# Altium PCB PCB1.PcbDoc
Units mm, origin at the board's own origin, x right, y up, seen from the top; angles counter-clockwise.
Board outline 70.61 x 51.82 mm, 2 copper layers (Top Layer, Bottom Layer); 33 components, 26 nets, 155 pads, 22 vias.
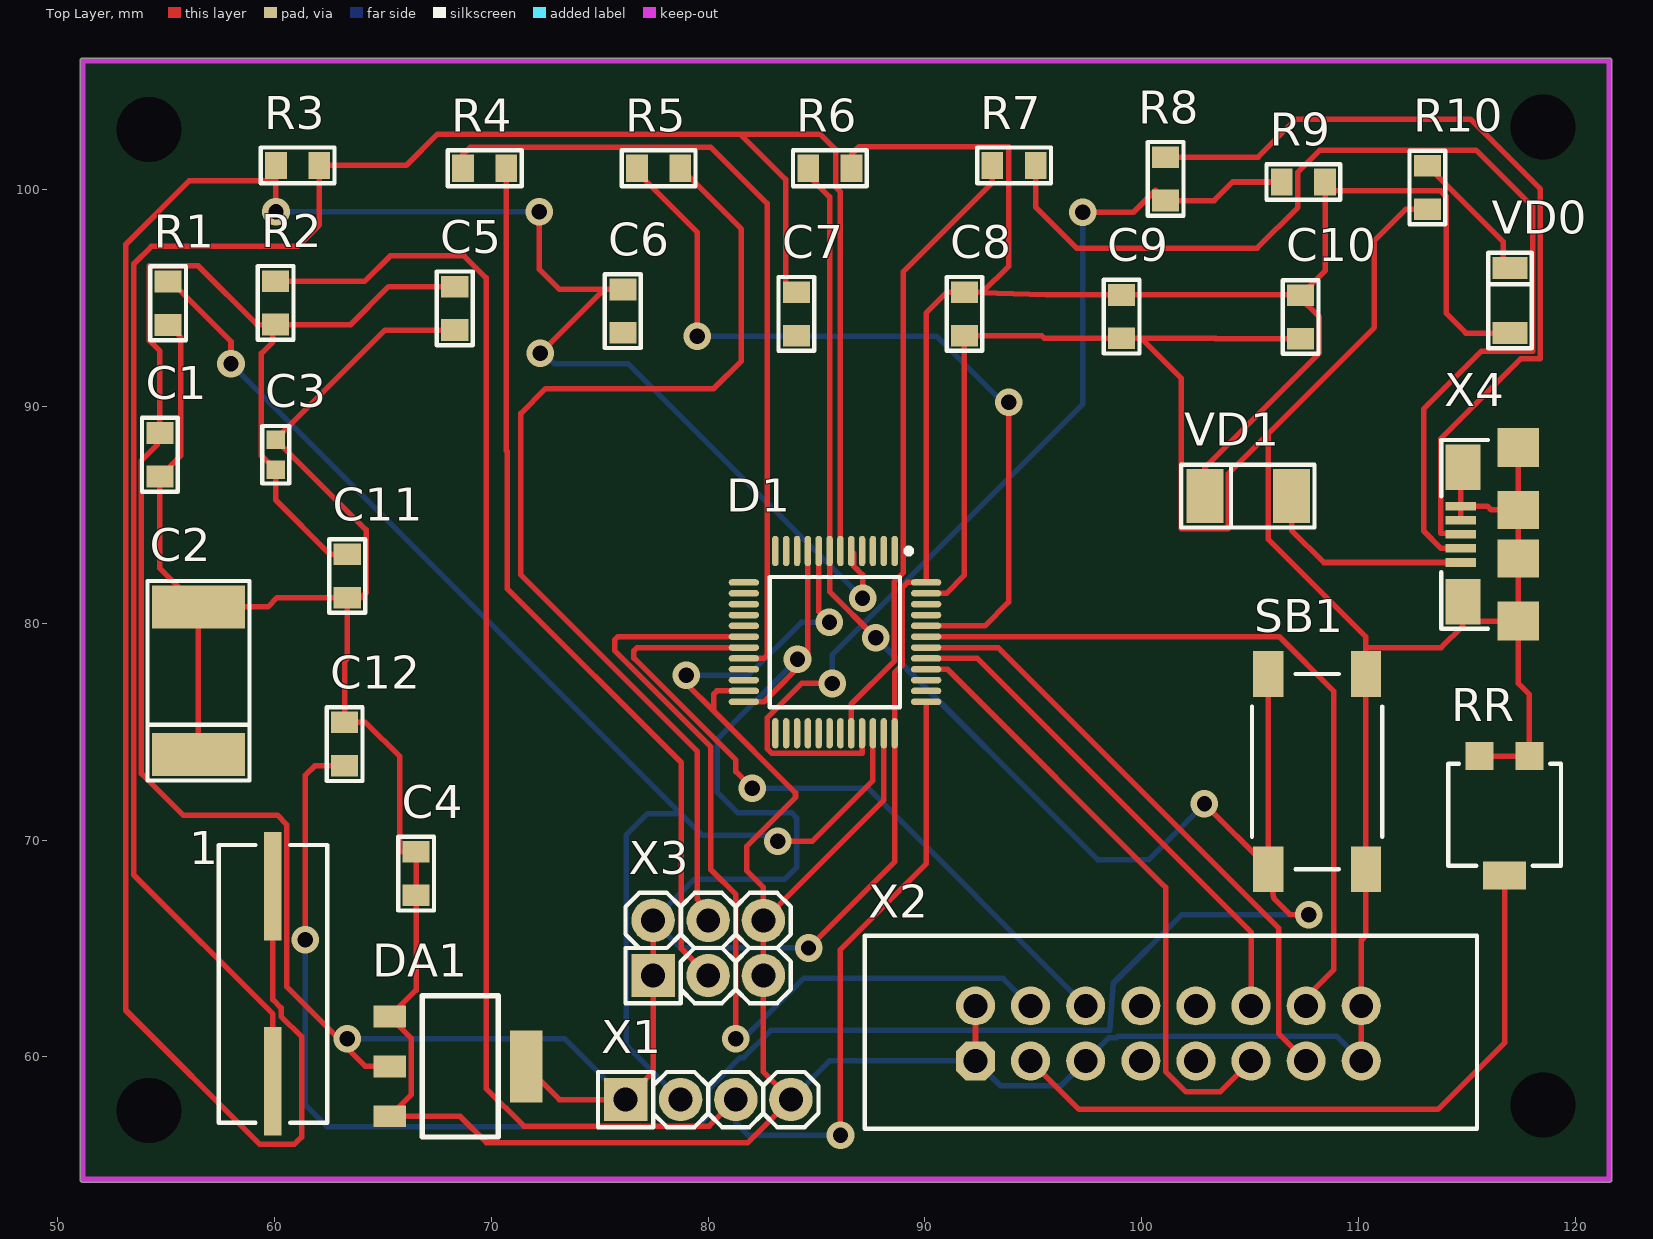
[diagram p0: Top Layer view]
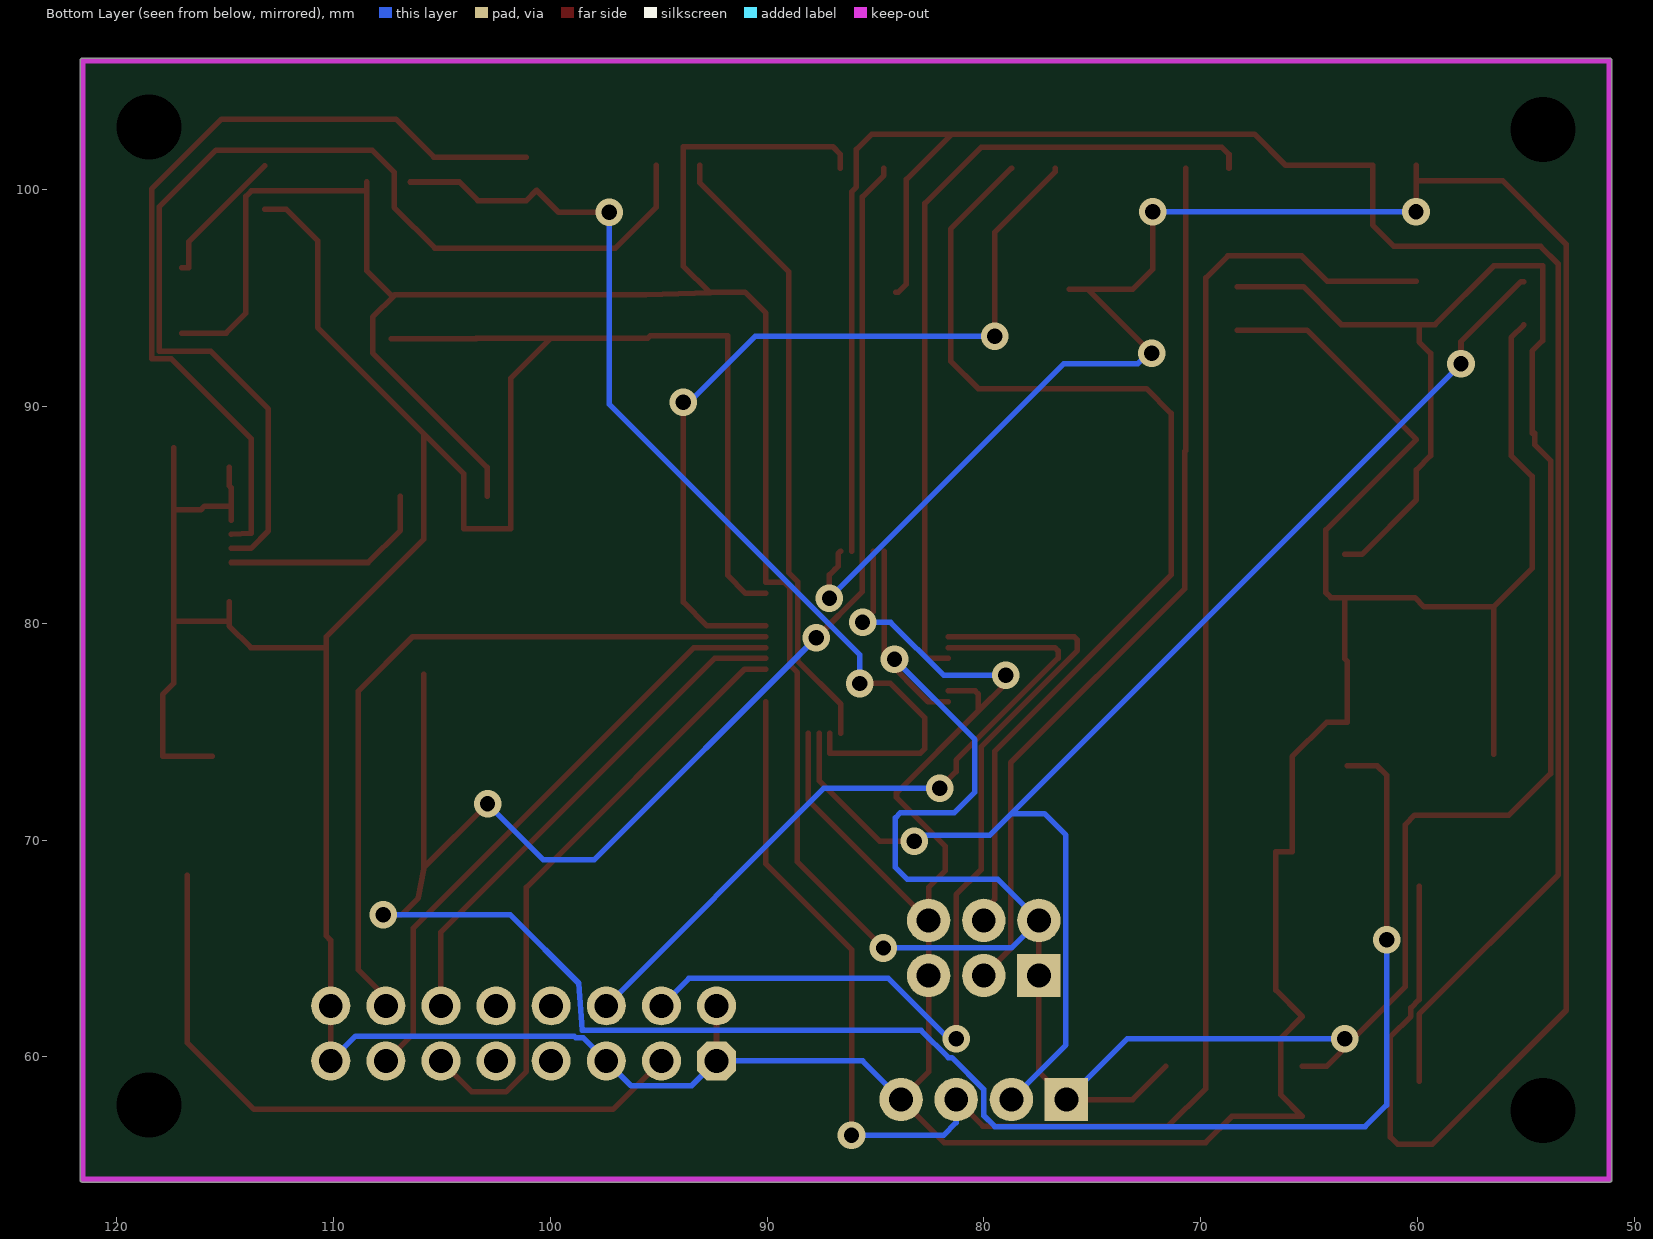
[diagram p1: Bottom Layer view, seen from below]
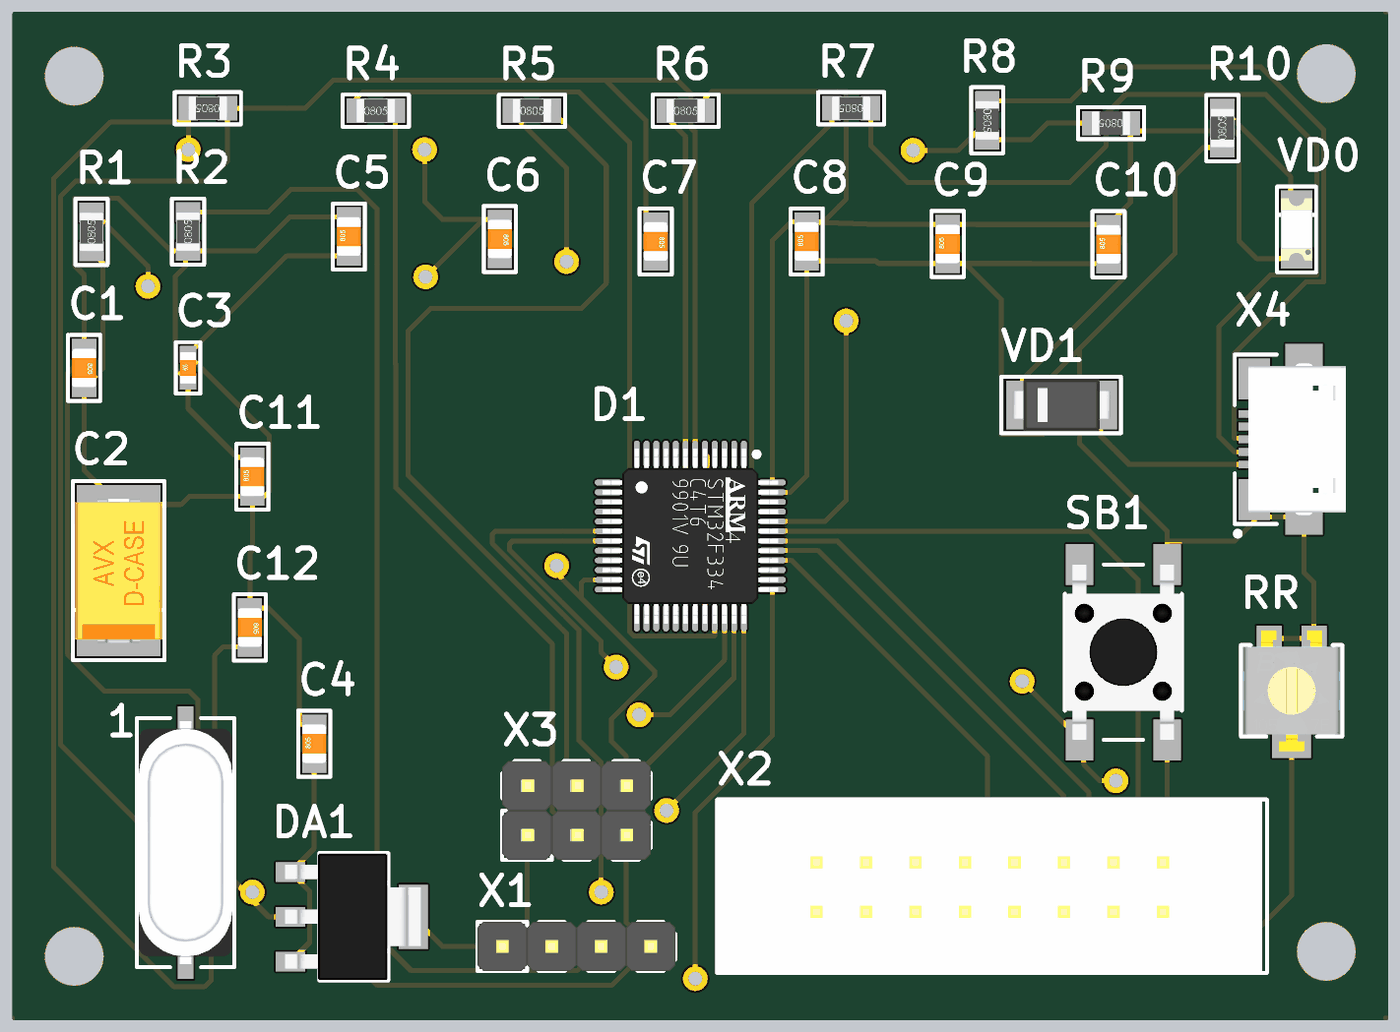
[diagram p2: 3D render of the assembled board from above, using the file's embedded part models]

## Layer stack, top to bottom
Top Solder: solder mask 0.0102, Solder Resist, Dk 3.5
Top Layer: signal copper 0.0356
Dielectric 1: dielectric 0.32, FR-4, Dk 4.8
Bottom Layer: signal copper 0.0356
Bottom Solder: solder mask 0.0102, Solder Resist, Dk 3.5

## Board outline
51.054,54.356 51.054,105.918 cw(c51.181,105.918) 51.181,106.045 121.539,106.045 cw(c121.539,105.918) 121.666,105.918 121.666,54.356 cw(c121.539,54.356) 121.539,54.229 51.181,54.229 cw(c51.181,54.356)

## Design rules (kind name [scope] priority, off if disabled: settings)
Clearance [All] p1: gap=0.1 ignorepadtopadclearanceinfootprint=FALSE
DiffPairsRouting [All] p1: maxlimit=0.254 minlimit=0.1 mostfreqgap=0.254 toplayer_minwidth=0.1 toplayer_maxwidth=0.381 toplayer_prefwidth=0.381 bottomlayer_minwidth=0.1 bottomlayer_maxwidth=0.381 bottomlayer_prefwidth=0.381 maxuncoupledlength=12.7
PolygonConnect [All] p1: connectstyle=Relief reliefconductorwidth=0.254 reliefentries=4 polygonreliefangle="90 Angle" airgapwidth=0.254
RoutingVias [All] p1: holewidth=0.711 width=1.27 viastyle="Through Hole" minholewidth=0.711 minwidth=1.27 maxholewidth=0.711 maxwidth=1.27
SolderMaskExpansion [All] p1: expansion=0.102 istentingtop=FALSE
Width [All] p1: maxlimit=0.254 minlimit=0.254 preferedwidth=0.254
29 further rules are at their usual default settings.

## Components (designator, comment, footprint, x,y, rotation, side; value= is the part's Value field where it differs from the comment)
1 "Crystal" HC-49SM 59.944,63.373 r90 top value=HC49S-8.000MHZ-20pF
C1 "Ceramic capacitor, 100nF, X7R, ±10%, 16V, 0805, -55...+125°C" "CAP: 0805" 54.737,87.757 r270 top value=100nF
C2 "Tantalum capacitor, 100uF, 16V, ±20%, 900mOhm, case D (7343), -55...+125°C" "CAP: TANTAL-D" 56.515,77.343 r90 top value=100uF
C3 "Aluminium capacitor, 330uF, 16V, ±20%, 54mOhm, 14x10x5 mm, -55...+105°C" "CAP: 0603" 60.071,87.757 r90 top value=330uF
C4 "Ceramic capacitor, 100nF, X7R, ±10%, 16V, 0805, -55...+125°C" "CAP: 0805" 66.548,68.453 r90 top value=100nF
C5 "Ceramic capacitor, 100nF, X7R, ±10%, 16V, 0805, -55...+125°C" "CAP: 0805" 68.326,94.504 r90 top value=100nF
C6 "Ceramic capacitor, 20pF, X7R, ±10%, 16V, 0805, -55...+125°C" "CAP: 0805" 76.073,94.377 r270 top value=20pF
C7 "Ceramic capacitor, 20pF, X7R, ±10%, 16V, 0805, -55...+125°C" "CAP: 0805" 84.074,94.25 r270 top value=20pF
C8 "Ceramic capacitor, 100nF, X7R, ±10%, 16V, 0805, -55...+125°C" "CAP: 0805" 91.821,94.25 r90 top value=100nF
C9 "Ceramic capacitor, 100nF, X7R, ±10%, 16V, 0805, -55...+125°C" "CAP: 0805" 99.06,94.123 r90 top value=100nF
C10 "Ceramic capacitor, 100nF, X7R, ±10%, 16V, 0805, -55...+125°C" "CAP: 0805" 107.315,94.107 r90 top value=100nF
C11 "Ceramic capacitor, 100nF, X7R, ±10%, 16V, 0805, -55...+125°C" "CAP: 0805" 63.373,82.169 r90 top value=100nF
C12 "Ceramic capacitor, 1μF, X7R, ±10%, 16V, 0805, -55...+125°C" "CAP: 0805" 63.246,74.422 r270 top value=1μF
D1 "IC microcontroller, 32-Bit, Cortex-M3, 72MHz, 64KB, 20KB, 2...3.6V, -40...+85°C, 48-LQFP" 48-LQFP 85.852,79.121 r270 top
DA1 "LM1117-Series" SOT-223 68.58,59.563 r270 top value=LM1117MPX-3.3
R1 "Resistor film, 10кОм, ±5%, 0805, 0.125W, -55...+125°C" "RES: 0805" 55.118,94.742 r90 top value=10кОм
R2 "Resistor film, 10кОм, ±5%, 0805, 0.125W, -55...+125°C" "RES: 0805" 60.071,94.758 r90 top value=10кОм
R3 "Resistor film, 1МОм, ±5%, 0805, 0.125W, -55...+125°C" "RES: 0805" 61.087,101.092 r180 top value=1МОм
R4 "Resistor film, 100кОм, ±5%, 0805, 0.125W, -55...+125°C" "RES: 0805" 69.707,100.965 r0 top value=100кОм
R5 "Resistor film, 100кОм, ±5%, 0805, 0.125W, -55...+125°C" "RES: 0805" 77.724,100.965 r0 top value=100кОм
R6 "Resistor film, 10R, ±5%, 0805, 0.125W, -55...+125°C" "RES: 0805" 85.614,100.965 r0 top value=10R
R7 "Resistor film, 20, ±5%, 0805, 0.125W, -55...+125°C" "RES: 0805" 94.107,101.092 r180 top value=20
R8 "Resistor film, 20, ±5%, 0805, 0.125W, -55...+125°C" "RES: 0805" 101.092,100.473 r270 top value=20
R9 "Resistor film, 10, ±5%, 0805, 0.125W, -55...+125°C" "RES: 0805" 107.442,100.33 r180 top value=10
R10 "Resistor film, 510, ±5%, 0805, 0.125W, -55...+125°C" "RES: 0805" 113.157,100.076 r90 top value=510
RR "Resistor film, 10k, ±10%, 3296W, 0.5W, -55...+125°C" "RES: 3314G" 116.713,71.12 r0 top value=10k
SB1 "Tactile button, 6x6mm" "BUT: 6x6 SMD" 108.077,73.152 r270 top
VD0 "LED, Green, *, *, *, -55...+150°C" "LED: 1206B" 116.967,94.869 r90 top
VD1 "Schottky diode, 80V, 500mA, 1V, 15pF, SOD-123, -55...+150°C" "DIODE: SMA" 104.902,85.852 r180 top
X1 "Connector, 4pin, 2.54mm, 500VAC, 3A" "CON: PLS-4" 80.01,58.039 r0 top
X2 "Connector, 16pin, 2.54mm, 250VAC, 3A" "CON: IDC-16MS" 101.219,61.087 r0 top
X3 "Connector, 6pin, 2.54mm, 500VAC, 3A" "CON: PLD-6" 80.01,65.024 r0 top
X4 "USB micro B" "CON: USB micro-A (ZX62-B-5PA)" 114.698,84.092 r90 top

## Footprints (in the part's own frame and the unit in brackets; to place one, negate y for a bottom-side part, rotate by r counter-clockwise, add the part's x,y. Pads: shape width x height; smd on the part's side, far side on the other; paste and mask are expansions set on the pad)
48-LQFP [mm] "QFP, 48-Leads, Body 7x7mm, Pitch 0.5mm, IPC Medium Density"
  oval 1.4x0.3 smd: 1(-4.2,2.75) 2(-4.2,2.25) 3(-4.2,1.75) 4(-4.2,1.25) 5(-4.2,0.75) 6(-4.2,0.25) 7(-4.2,-0.25) 8(-4.2,-0.75) 9(-4.2,-1.25) 10(-4.2,-1.75) 11(-4.2,-2.25) 12(-4.2,-2.75) 25(4.2,-2.75) 26(4.2,-2.25) 27(4.2,-1.75) 28(4.2,-1.25) 29(4.2,-0.75) 30(4.2,-0.25) 31(4.2,0.25) 32(4.2,0.75) 33(4.2,1.25) 34(4.2,1.75) 35(4.2,2.25) 36(4.2,2.75)
  oval 0.3x1.4 smd: 13(-2.75,-4.2) 14(-2.25,-4.2) 15(-1.75,-4.2) 16(-1.25,-4.2) 17(-0.75,-4.2) 18(-0.25,-4.2) 19(0.25,-4.2) 20(0.75,-4.2) 21(1.25,-4.2) 22(1.75,-4.2) 23(2.25,-4.2) 24(2.75,-4.2) 37(2.75,4.2) 38(2.25,4.2) 39(1.75,4.2) 40(1.25,4.2) 41(0.75,4.2) 42(0.25,4.2) 43(-0.25,4.2) 44(-0.75,4.2) 45(-1.25,4.2) 46(-1.75,4.2) 47(-2.25,4.2) 48(-2.75,4.2)
  round 0.5 on Mech1: ""(-4,4)
  silkscreen extent -4.32,-3 3,3.53, body extent -4.5,-4.5 4.5,4.5, height 1.6
"BUT: 6x6 SMD" [mm] "Leaded Tactile Button 6x6"
  rect 2.1x1.4 smd: 1(-4.5,2.25) 1(4.5,2.25) 2(-4.5,-2.25) 2(4.5,-2.25)
  silkscreen extent -4.5,-3 4.5,3, body extent -4.5,-3 4.5,3, height 4.3
"CAP: 0603" [mm]
  rect 0.85x0.85 smd: 1(-0.7,0) 2(0.7,0)
  silkscreen extent -1.33,-0.62 1.33,0.62, body extent -0.8,-0.4 0.8,0.4, height 0.3
"CAP: 0805" [mm]
  rect 1x1.25 smd: 1(-1,0) 2(1,0)
  silkscreen extent -1.7,-0.82 1.7,0.82, body extent -1,-0.62 1,0.63, height 0.78
"CAP: TANTAL-D" [mm]
  rect 2x4.3 smd: 1(-3.4,0) 2(3.4,0)
  silkscreen extent -4.6,-2.35 4.6,2.35, body extent -3.7,-2.22 3.7,2.23, height 3.01
"CON: IDC-16MS" [mm] "IDC-16MS straight leads pcb mount"
  oct 1.8x1.8 hole 1.1: 1(-8.89,-1.27)
  round 1.8 hole 1.1: 2(-8.89,1.27) 3(-6.35,-1.27) 4(-6.35,1.27) 5(-3.81,-1.27) 6(-3.81,1.27) 7(-1.27,-1.27) 8(-1.27,1.27) 9(1.27,-1.27) 10(1.27,1.27) 11(3.81,-1.27) 12(3.81,1.27) 13(6.35,-1.27) 14(6.35,1.27) 15(8.89,-1.27) 16(8.89,1.27)
  round 0.5 on Mech1: 39(-13.5,-3.9)
  silkscreen extent -14,-4.4 14.22,4.5, body extent -13.98,-4.4 13.99,4.4, height 9.1
"CON: PLD-6" [mm]
  rect 2x2 hole 1.1: 1(-2.54,-1.27)
  round 2 hole 1.1: 2(-2.54,1.27) 3(0,-1.27) 4(0,1.27) 5(2.54,-1.27) 6(2.54,1.27)
  silkscreen extent -3.81,-2.54 3.81,2.54, body extent -3.81,-2.54 3.81,2.54, height 8.54
"CON: PLS-4" [mm] "PLS-40 4 pin header"
  rect 2x2 hole 1.1: 1(-3.81,0)
  round 2 hole 1.1: 2(-1.27,0) 3(1.27,0) 4(3.81,0)
  silkscreen extent -5.08,-1.27 5.08,1.27, body extent -5.08,-1.27 5.08,1.27, height 8.54
"CON: USB micro-A (ZX62-B-5PA)" [mm]
  rect 1.8x1.9 smd: 0(-4,-2.65) 0(4,-2.65)
  rect 2.1x1.6 smd: 0(-3.1,-0.1) 0(3.1,-0.1)
  rect 1.75x1.9 smd: 0(-1.125,-2.65) 0(1.125,-2.65)
  rect 0.4x1.4 smd: 1(-1.3,0) 2(-0.65,0) 3(0,0) 4(0.65,0) 5(1.3,0)
  round 0.5 on Top Overlay: ""(-4.85,0.75)
  silkscreen extent -4.35,-1.25 4.35,0.9, body extent -3.9,-4.8 3.9,0.2, height 2.68
"DIODE: SMA" [mm]
  rect 1.7x2.5 smd: 1(-2,0) 2(2,0)
  round 0.5 on Mech1: ""(2,0.9)
  silkscreen extent -3.05,-1.45 3.1,1.45, body extent -2.5,-1.35 2.5,1.35, height 2.28
HC-49SM [mm] "HC49 Surface Mount Footprint"
  rect 5x0.8 smd: 1(-4.5,0) 3(4.5,0)
  silkscreen extent -6.4,-2.5 6.4,2.5, body extent -6.25,-2.4 6.25,2.4, height 4.02
"LED: 1206B" [mm]
  rect 1x1.6 smd: 1(-1.5,0) 2(1.5,0)
  silkscreen extent -2.2,-1 2.2,1, body extent -1.6,-0.8 1.6,0.8, height 1.1
"RES: 0805" [mm]
  rect 1x1.25 smd: 1(-1,0) 2(1,0)
  silkscreen extent -1.7,-0.82 1.7,0.82, body extent -1,-0.6 1,0.6, height 0.44
"RES: 3314G" [mm]
  rect 1.3x1.3 smd: 1(-1.15,2.75) 3(1.15,2.75)
  rect 2x1.3 smd: 2(0,-2.75)
  round 0.5 on Mech1: ""(-2,2.65)
  silkscreen extent -2.6,-2.3 2.6,2.4, body extent -2.5,-3.05 2.5,3.15, height 2.72
SOT-223 [mm]
  rect 1x1.5 smd: 1(-2.3,-3.25) 2(0,-3.25) 3(2.3,-3.25)
  rect 3.3x1.5 smd: 2(0,3.05)
  silkscreen extent -3.25,-1.75 3.25,1.75, body extent -3.25,-3.53 3.25,3.43, height 1.65

## Part data
1: library part HC49SM-8.000MHz-20pF, Load Capacitance=20pF, Output Frequency=8MHz, Temperature Coefficient=±50ppm, Application Category=1, ID=17, Part Number=HC49SM-8.000MHz-20pF, Published=08.03.2013, Publisher="Andrew Danich", Type=Резонатор
C1 C4 C5 C6 C7 C8 C9 C10 C11 C12: library part Ceramic_0805, Manufacturer=Yageo, Package=0805, PartNumber=CC0805KRX7R7BB104, Temperature=-55...+125°C, Tolerance=±10%, TypeCapacitor="Ceramic capacitor", TypeDielectric=X7R, Voltage=16V, HelpURL=https://www.digikey.com/product-detail/en/yageo/CC0805KRX7R7BB104/311-1142-1-ND/303052
  C1 C4 C5 C8 C9 C10 C11: ValueManufacturerPartNumber="Ceramic capacitor, 100nF, X7R, ±10%, 16V, 0805, -55...+125°C"
  C6 C7: ValueManufacturerPartNumber="Ceramic capacitor, 20pF, X7R, ±10%, 16V, 0805, -55...+125°C"
  C12: ValueManufacturerPartNumber="Ceramic capacitor, 1μF, X7R, ±10%, 16V, 0805, -55...+125°C"
C2: library part Tantal_D, Manufacturer=AVX, Package="case D (7343)", PartNumber=TAJD476M035RNJV, Temperature=-55...+125°C, Tolerance=±20%, TypeCapacitor="Tantalum capacitor", TypeDielectric=X7R, Voltage=16V, HelpURL=https://www.digikey.com/product-detail/en/avx-corporation/TAJD476M035RNJV/478-12122-1-ND/8605695, Impedance=900mOhm, ValueManufacturerPartNumber="Tantalum capacitor, 100uF, 16V, ±20%, 900mOhm, case D (7343), -55...+125°C"
C3: library part Aluminium, Manufacturer=Wurth, Package="14x10x5 mm", PartNumber=860080475013, Temperature=-55...+105°C, Tolerance=±20%, TypeCapacitor="Aluminium capacitor", Voltage=16V, HelpURL=https://www.digikey.com/product-detail/en/wurth-electronics-inc/860080475013/732-9029-1-ND/5728972, Impedance=54mOhm, ValueManufacturerPartNumber="Aluminium capacitor, 330uF, 16V, ±20%, 54mOhm, 14x10x5 mm, -55...+105°C"
D1: library part STM32F103C8T6, "Cortex-M3", Manufacturer=STMicroelectronics, Package=48-LQFP, Temperature=-40...+85°C, ComponentType="IC microcontroller", CoreProcessor=Cortex-M3, CoreSize=32-Bit, HelpURL=https://www.digikey.com/product-detail/en/stmicroelectronics/STM32F103C8T6TR/497-17666-1-ND/7804402, MemoryRAM=20KB, MemoryROM=64KB, PartNumber=STM32F103C8T6, Speed=72MHz, Supply=2...3.6V, ValueManufacturerPartNumber="IC microcontroller, 32-Bit, Cortex-M3, 72MHz, 64KB, 20KB, 2...3.6V, -40...+85°C, 48-LQFP"
DA1: library part LM1117MPX-3.3, Input Voltage=+8.5…20V, Output Current=800mA, Output Voltage=+3.3V, ID=9, Part Number=LM1117MPX-3.3, Published=13.08.2015, Publisher="Andrew Danich", Type=Микросхема
R1 R2 R3 R4 R5 R6 R7 R8 R9 R10: library part Resistor_0805, Manufacturer=Yageo, Package=0805, PartNumber=RC0805JR-07100RL, Power=0.125W, Temperature=-55...+125°C, Tolerance=±5%, TypeResistor="Resistor film", HelpURL=https://www.digikey.com/product-detail/en/yageo/RC0805JR-07100RL/311-100ARCT-ND/731185
  R1 R2: ValueManufacturerPartNumber="Resistor film, 10кОм, ±5%, 0805, 0.125W, -55...+125°C"
  R3: ValueManufacturerPartNumber="Resistor film, 1МОм, ±5%, 0805, 0.125W, -55...+125°C"
  R4 R5: ValueManufacturerPartNumber="Resistor film, 100кОм, ±5%, 0805, 0.125W, -55...+125°C"
  R6: ValueManufacturerPartNumber="Resistor film, 10R, ±5%, 0805, 0.125W, -55...+125°C"
  R7 R8: ValueManufacturerPartNumber="Resistor film, 20, ±5%, 0805, 0.125W, -55...+125°C"
  R9: ValueManufacturerPartNumber="Resistor film, 10, ±5%, 0805, 0.125W, -55...+125°C"
  R10: ValueManufacturerPartNumber="Resistor film, 510, ±5%, 0805, 0.125W, -55...+125°C"
RR: library part Trimmer, Manufacturer=Bourns, Package=3296W, PartNumber=3296W-1-103LF, Power=0.5W, Temperature=-55...+125°C, Tolerance=±10%, TypeResistor="Resistor film", HelpURL=https://www.digikey.com/product-detail/en/bourns-inc/3296W-1-103LF/3296W-103LF-ND/1088045, ValueManufacturerPartNumber="Resistor film, 10k, ±10%, 3296W, 0.5W, -55...+125°C"
SB1: library part Button_tactile, Manufacturer="TE Connectivity", Package=6x6mm, PartNumber=FSM2JSMAATR, CommentText="\"Кнопка\"", HelpURL=https://www.digikey.com/product-detail/en/te-connectivity-alcoswitch-switches/FSM2JSMAATR/450-1792-1-ND/3503931, TypeButton="Tactile button", ValueManufacturerPartNumber="Tactile button, 6x6mm"
VD0: library part LED_single, Color=GREEN, ColorParameter=Green, Temperature=-55...+150°C, TypeDiode=LED, ValueManufacturerPartNumber="LED, Green, *, *, *, -55...+150°C"
VD1: library part Schottky_single, Current=500mA, Manufacturer="Diodes Incorporated", Package=SOD-123, PartNumber=MBR0580S1-7, Temperature=-55...+150°C, Voltage=80V, VoltageDrop=1V, HelpURL=https://www.digikey.com/product-detail/en/diodes-incorporated/MBR0580S1-7/MBR0580S1-7DICT-ND/5080371, RecoveryTime=15pF, TypeDiode="Schottky diode", ValueManufacturerPartNumber="Schottky diode, 80V, 500mA, 1V, 15pF, SOD-123, -55...+150°C"
X1: library part PLS-4, CurrentMax=3A, Manufacturer=Connfly, VoltageMax=500VAC, CommentText=SWD, HelpURL=https://www.chipdip.ru/product/pls-4, Multichannel=4pin, PartNumber=PLS-4, Pitch=2.54mm, TypeConnector=Connector, ValueManufacturerPartNumber="Connector, 4pin, 2.54mm, 500VAC, 3A"
X2: library part IDC-16, CurrentMax=3A, Manufacturer=Connfly, VoltageMax=250VAC, CommentText="LCD 1602", HelpURL=https://www.chipdip.ru/product/idc-16ms, Multichannel=16pin, PartNumber=IDC-16, Pitch=2.54mm, TypeConnector=Connector, ValueManufacturerPartNumber="Connector, 16pin, 2.54mm, 250VAC, 3A"
X3: library part PLD-6, CurrentMax=3A, Manufacturer=Connfly, VoltageMax=500VAC, CommentText="\"Разъем\"", HelpURL=https://www.chipdip.ru/product/pld-6, Multichannel=6pin, PartNumber=PLD-6, Pitch=2.54mm, TypeConnector=Connector, ValueManufacturerPartNumber="Connector, 6pin, 2.54mm, 500VAC, 3A"
X4: library part Connector_USB_micro_B, Manufacturer="Hirose Electric", PartNumber=ZX62-B-5PA, CommentText="\"USB\"", HelpURL=https://www.digikey.com/product-detail/en/hirose-electric-co-ltd/ZX62-B-5PA/H11579CT-ND/1851090, TypeConnector="USB micro B", ValueManufacturerPartNumber="USB micro B"

## Free pads (board coordinates)
  round 1.524 hole 3: 2(54.229,57.531) 2(54.229,102.743) 2(118.491,57.785) 2(118.491,102.87)

## Via types
v1: diameter 1.27, hole 0.711, Top Layer to Bottom Layer, 22 vias

## Nets (pads, with @x,y where several pads share a name; then routed paths per layer and width w, separated by ;. In a path a pad name is that pad's centre, name@x,y a point inside that pad or via, vN(x,y) a via of type N, cw(c..) or ccw(c..) an arc to the next point about the centre after c; other vN are vias at no path point)
+3.3: C1.1 C3.1 C5.2 C8.2 C9.2 C10.2 C11.2 D1.9 D1.24 D1.36 D1.48 DA1.2 R2.1 R6.2 R9.1 VD0.1 VD1.2 X1.1 X3.1 X3.2 | length 247.4
  Top Layer w0.254: v1(63.373,60.833) 63.373,60.401 64.211,59.563 DA1.2@65.33,59.563 ; C11.2 62.586,83.169 60.071,85.684 C3.1 59.411,87.717 59.411,92.431 59.944,92.964 R2.1@59.944,93.758 ; v1@63.449,60.376 60.579,63.246 60.579,70.714 60.147,71.145 55.804,71.145 53.885,73.064 53.885,87.484 54.61,88.209 54.61,88.757 C1.1 54.737,92.532 54.254,93.015 54.254,96.469 56.496,96.469 59.207,93.758 R2.1@59.944,93.758 ; C5.2 65.278,95.504 63.532,93.758 R2.1 R2.1@59.944,93.758 ; DA1.2@71.63,59.563 73.154,58.039 X1.1 77.47,59.309 X3.1 X3.2 ; D1.24 82.569,76.371 84.602,78.404 84.602,78.811 ; v1(84.125,78.334) 84.602,78.811 ; D1.9 84.602,78.811 ; v1(84.633,65.024) 88.602,68.993 D1.36 88.602,77.712 88.948,78.057 88.948,81.626 89.193,81.871 D1.48 90.052,94.285 91.017,95.25 C8.2 ; R6.2 86.614,101.6 86.97,101.956 93.853,101.956 93.853,96.444 92.659,95.25 C8.2 ; VD1.2 102.902,87.179 108.179,92.456 108.179,94.107 C10.2@107.179,95.107 ; R9.1 R9.1@108.442,99.924 ; VD0.1 114.936,93.369 114.021,94.285 114.021,99.67 113.767,99.924 R9.1@108.442,99.924 ; C8.2 95.58,95.123 C9.2 ; C9.2 107.163,95.123 C10.2@107.179,95.107 ; C9.2 C10.2@107.179,95.107 ; C10.2@107.179,95.107 C10.2 108.442,96.234 R9.1@108.442,99.924
  Bottom Layer w0.254: v1(63.373,60.833) 73.406,60.833 X1.1 ; v1(84.125,78.334) 80.416,74.625 80.416,72.212 81.382,71.247 83.862,71.247 84.085,71.024 84.085,68.743 83.541,68.199 79.375,68.199 X3.2 78.74,65.024 v1(84.633,65.024)
+5: C1.2 C2.1 C2.2 C3.2 C4.1 C4.2 C5.1 C8.1 C9.1 C10.1 C11.1 C12.1 D1.8 D1.23 D1.35 D1.47 DA1.1 DA1.3 R1.1 R10.1 RR.1 RR.3 SB1.1 X1.4 X2.1 X2.2 X2.5 X2.15 X2.16 X3.5 X3.6 X4.0 X4.4 X4.5 | length 295.8
  Top Layer w0.254: R1.1 55.702,93.158 55.702,87.722 C1.2 54.737,82.521 C2.2 ; C2.1 C2.2 ; C5.1 65.118,93.504 C3.2 64.237,84.291 64.237,81.398 64.008,81.169 C11.1 ; v1(78.994,77.597) 78.994,77.216 80.264,75.946 ; D1.23 80.413,76.871 80.264,76.722 80.264,75.946 ; D1.8 85.102,80.531 v1(85.598,80.035) ; D1.35 88.102,71.846 X3.6 ; D1.47 90.983,81.371 91.821,82.209 C8.1 95.377,93.25 95.504,93.123 C9.1 99.974,93.123 ; X2.1 X2.2 ; C10.1 103.411,93.107 103.395,93.123 99.974,93.123 ; X2.15 X2.16 110.109,65.38 110.327,65.598 110.327,68.652 110.327,77.652 110.327,78.867 ; R10.1 112.166,99.076 110.719,97.628 110.719,93.624 105.816,88.722 ; X4.4 X4.5 ; X4.0@114.798,80.992 X4.0@114.798,80.092 ; X4.0@114.798,87.192 114.798,86.333 114.698,86.233 X4.5 ; RR.1 RR.3 117.863,76.708 117.348,77.223 X4.0@117.348,80.092 ; X4.0@117.348,88.092 X4.0@117.348,85.217 ; C2.2 59.715,80.743 60.141,81.169 C11.1 ; C11.1 63.373,78.359 63.246,78.232 C12.1 64.211,75.422 65.793,73.841 65.793,69.453 C4.2 C4.1 66.548,63.081 DA1.1 66.319,60.874 66.319,58.252 DA1.3 68.58,57.263 69.785,56.058 81.839,56.058 X1.4 82.55,59.309 X3.5 X3.6 ; 80.264,75.946 84.032,72.178 84.032,71.967 81.788,69.723 81.788,68.58 82.55,67.818 X3.6 ; 99.974,93.123 101.803,91.294 101.803,84.353 103.988,84.353 103.988,86.893 105.816,88.722 ; 105.816,88.722 105.816,83.871 110.327,79.36 110.327,78.867 ; 110.327,78.867 113.792,78.867 114.798,79.873 X4.0@114.798,80.092 ; X4.5 115.926,85.392 116.101,85.217 X4.0@117.348,85.217 ; X4.0@114.798,80.092 X4.0@117.348,80.092 ; X4.0@117.348,80.092 117.348,82.967 X4.0@117.348,85.217
  Bottom Layer w0.254: v1(78.994,77.597) 81.864,77.597 84.303,80.035 v1(85.598,80.035) ; X1.4 85.598,59.817 X2.1 93.472,58.674 96.266,58.674 X2.5 98.468,60.876 98.806,60.876 98.89,60.96 108.966,60.96 X2.15
Net1_1: 1.1 C7.1 D1.6 R3.1 | length 104.1
  Top Layer w0.254: 1.1 59.944,61.978 53.531,68.391 53.531,96.557 54.34,97.367 61.105,97.367 62.087,98.349 R3.1 66.091,101.092 67.539,102.54 81.483,102.54 ; C7.1 83.949,95.25 83.576,95.623 83.576,100.447 81.483,102.54 ; D1.6 86.102,99.877 85.877,100.101 85.877,101.829 85.166,102.54 81.483,102.54
Net1_3: 1.3 C6.1 D1.5 R3.2 | length 113.6
  Top Layer w0.254: 1.3 59.944,62.649 60.325,62.268 60.325,61.874 61.265,60.935 61.265,56.312 60.935,55.982 59.334,55.982 53.162,62.154 53.162,97.46 56.083,100.381 60.087,100.381 ; v1(60.087,98.968) 60.087,100.381 ; R3.2 60.087,100.381 ; v1(72.212,98.968) 72.212,96.317 73.152,95.377 75.209,95.377 ; v1(72.263,92.431) 75.209,95.377 ; C6.1 75.209,95.377 ; D1.5 86.725,83.198 86.725,82.615 86.868,82.472 87.122,82.218 v1(87.122,81.153)
  Bottom Layer w0.254: v1(60.087,98.968) v1(72.212,98.968) ; v1(72.263,92.431) 72.437,92.431 72.92,91.948 76.327,91.948 v1(87.122,81.153)
NetC12_2: C12.2 D1.7 R6.1 SB1.2 | length 129.6
  Top Layer w0.254: v1(61.443,65.405) 61.443,72.99 61.874,73.422 C12.2 ; R6.1 84.614,100.635 85.602,99.647 D1.7 85.602,81.454 v1(87.732,79.324) ; v1(102.883,71.666) SB1.2@105.827,68.722 ; SB1.2@105.827,77.652 SB1.2@105.827,68.722 ; v1(107.696,66.548) 106.858,66.548 106.07,67.335 105.827,68.652 SB1.2@105.827,68.722
  Bottom Layer w0.254: v1(61.443,65.405) 61.443,57.785 62.433,56.794 79.502,56.794 80.01,57.302 80.01,58.504 81.477,59.971 81.637,59.971 82.896,61.23 98.527,61.23 98.679,63.398 101.829,66.548 v1(107.696,66.548) ; v1(87.732,79.324) 97.968,69.088 100.305,69.088 v1(102.883,71.666)
NetD1_2: D1.2
NetD1_3: D1.3
NetD1_18: D1.18 X2.4 | length 42
  Top Layer w0.254: v1(81.28,60.833) 81.28,67.488 80.137,68.631 80.137,74.295 75.692,78.74 75.692,79.222 75.841,79.371 D1.18
  Bottom Layer w0.254: v1(81.28,60.833) 81.61,60.833 84.404,63.627 93.599,63.627 X2.4
NetD1_19: D1.19 X2.6 | length 33.2
  Top Layer w0.254: D1.19 76.73,78.871 76.581,78.722 76.581,78.386 81.28,73.687 81.28,73.152 v1(82.042,72.39)
  Bottom Layer w0.254: v1(82.042,72.39) 87.376,72.39 X2.6
NetD1_20: D1.20 R4.1 | length 37.8
  Top Layer w0.254: R4.1 68.707,101.6 69.037,101.93 80.137,101.93 82.725,99.342 82.725,78.52 82.576,78.371 D1.20
NetD1_32: D1.32 R7.2 | length 28.9
  Top Layer w0.254: D1.32 86.602,76.266 88.594,78.257 88.594,81.913 89.002,82.321 89.002,96.199 93.107,100.305 R7.2
NetD1_33: D1.33 R8.2 R9.2 | length 47.1
  Top Layer w0.254: v1(85.725,77.216) 84.314,77.216 82.725,75.627 82.725,74.215 82.946,73.994 87.102,73.994 D1.33 ; v1(97.282,98.933) 99.6,98.933 100.616,99.949 R8.2 103.327,99.473 104.184,100.33 R9.2
  Bottom Layer w0.254: v1(85.725,77.216) 85.725,78.537 97.282,90.094 v1(97.282,98.933)
NetD1_34: D1.34 R1.2 X1.2 | length 63.3
  Top Layer w0.254: R1.2 55.245,95.742 58.014,92.973 v1(58.014,91.948) ; v1(83.223,69.939) 84.798,69.939 87.602,72.743 D1.34
  Bottom Layer w0.254: v1(58.014,91.948) 78.74,71.222 ; X1.2 76.225,60.554 76.225,70.231 77.216,71.222 78.74,71.222 ; v1(83.223,69.939) 82.931,70.231 79.731,70.231 78.74,71.222
NetD1_37: D1.37 R2.2 X1.3 | length 88.5
  Top Layer w0.254: R2.2 64.186,95.758 65.354,96.926 68.758,96.926 69.774,95.91 69.774,58.547 71.509,56.812 80.053,56.812 X1.3 ; v1(86.106,56.388) 86.106,64.948 90.068,68.91 90.068,76.371 D1.37
  Bottom Layer w0.254: X1.3 81.28,56.972 81.864,56.388 v1(86.106,56.388)
NetD1_40: D1.40 X2.11 | length 28.6
  Top Layer w0.254: D1.40 91.034,77.871 101.092,67.813 101.092,59.334 102.032,58.395 103.607,58.395 X2.11
NetD1_41: D1.41 X2.12 | length 23.6
  Top Layer w0.254: D1.41 92.419,78.371 105.029,65.761 X2.12
NetD1_42: D1.42 X2.13 | length 28.3
  Top Layer w0.254: D1.42 93.366,78.871 106.299,65.938 106.299,61.087 X2.13
NetD1_43: D1.43 X2.14 | length 34.9
  Top Layer w0.254: D1.43 106.328,79.371 108.839,76.86 108.839,64.018 107.569,62.748 X2.14
NetD1_44: D1.44 R5.1 | length 38
  Top Layer w0.254: R5.1 76.724,100.797 79.502,98.019 v1(79.502,93.218) ; D1.44 92.761,79.871 93.853,80.963 v1(93.853,90.17)
  Bottom Layer w0.254: v1(79.502,93.218) 90.551,93.218 93.599,90.17 v1(93.853,90.17)
NetR4_2: R4.2 X3.3 | length 41.1
  Top Layer w0.254: R4.2 70.707,87.941 70.739,87.909 70.739,81.59 78.765,73.564 78.765,64.999 X3.3
NetR5_2: R5.2 X3.4 | length 48.2
  Top Layer w0.254: R5.2 81.534,98.155 81.534,92.075 80.264,90.805 72.517,90.805 71.374,89.662 71.374,82.226 79.502,74.098 79.502,67.274 80.01,66.766 X3.4
NetR7_1: R7.1 X4.2 | length 50
  Top Layer w0.254: R7.1 95.107,99.162 96.987,97.282 105.308,97.282 107.188,99.162 107.188,100.787 108.204,101.803 115.396,101.803 118.008,99.19 118.008,92.532 115.646,92.532 112.979,89.865 112.979,84.255 113.792,83.442 X4.2
NetR8_1: R8.1 X4.3 | length 38.6
  Top Layer w0.254: R8.1 105.359,101.473 107.112,103.226 115.138,103.226 118.364,100 118.364,92.177 117.45,92.177 113.767,88.494 113.767,84.143 X4.3
NetR10_2: R10.2 VD0.2 | length 6.5
  Top Layer w0.254: R10.2 116.662,97.571 116.662,96.369 VD0.2
NetRR_2: RR.2 X2.3 | length 31.8
  Top Layer w0.254: X2.3 97.104,57.582 113.64,57.582 116.713,60.655 RR.2
NetVD1_1: VD1.1 X4.1 | length 10
  Top Layer w0.254: VD1.1 106.902,84.277 108.387,82.792 X4.1
pads on no net: C6.2 C7.2 D1. D1.1 D1.4 D1.10 D1.11 D1.12 D1.13 D1.14 D1.15 D1.16 D1.17 D1.21 D1.22 D1.25 D1.26 D1.27 D1.28 D1.29 D1.30 D1.31 D1.38 D1.39 D1.45 D1.46 RR. VD1. X2.7 X2.8 X2.9 X2.10 X2.39 X4.

## Keep-outs
Keep-Out Layer:
  lines w0.254: 51.181,54.356 51.181,105.918 121.539,105.918 121.539,54.356 51.181,54.356

## Dimensions
121.539,106.045 to 121.666,54.356 on Top Layer
51.054,54.356 to 121.666,54.356 on Top Layer